# Altium PCB ArduinoUnoShield.PcbDoc
Units mil, origin at the board's own origin, x right, y up, seen from the top; angles counter-clockwise.
Board outline 2645 x 2100 mil, 2 copper layers (Top Layer, Bottom Layer), stack 62.8 mil thick; 58 components, 51 nets, 225 pads, 115 vias.
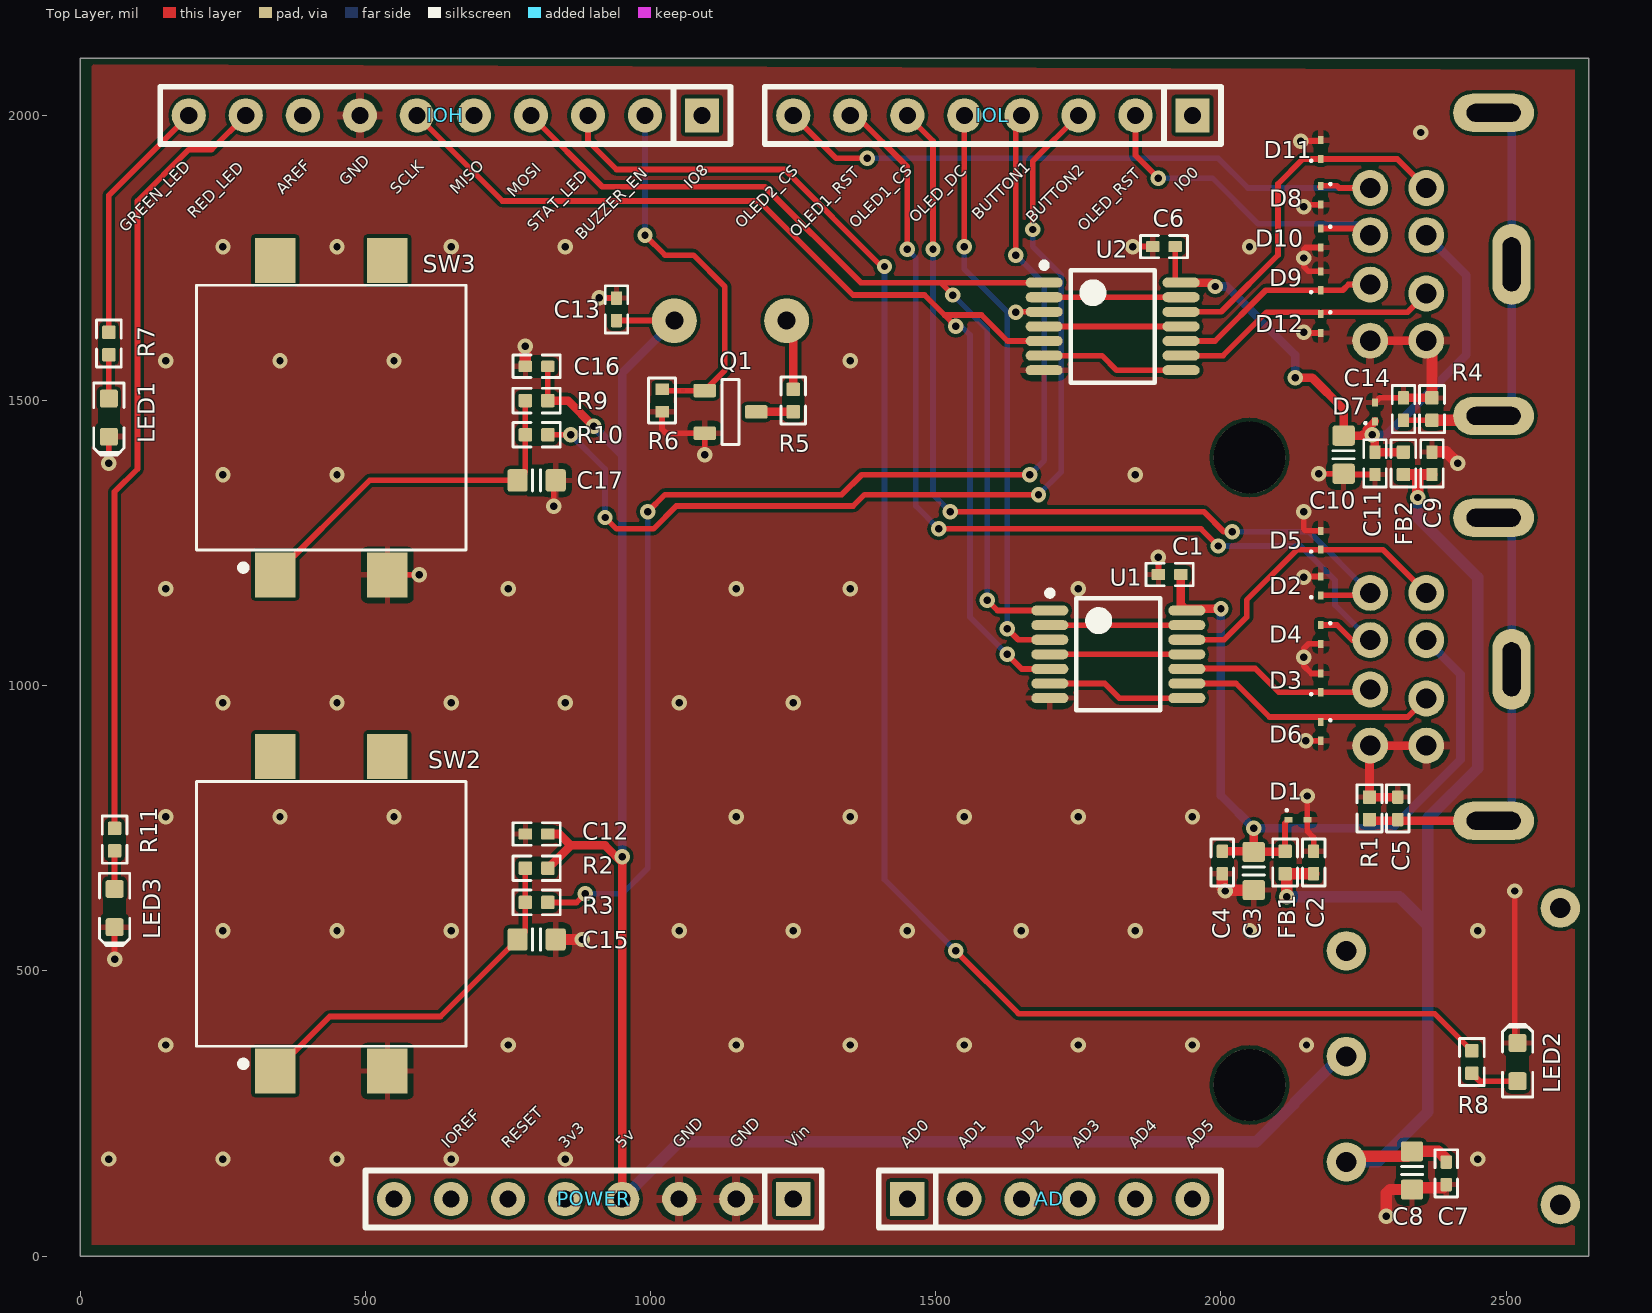
[diagram p0: Top Layer view]
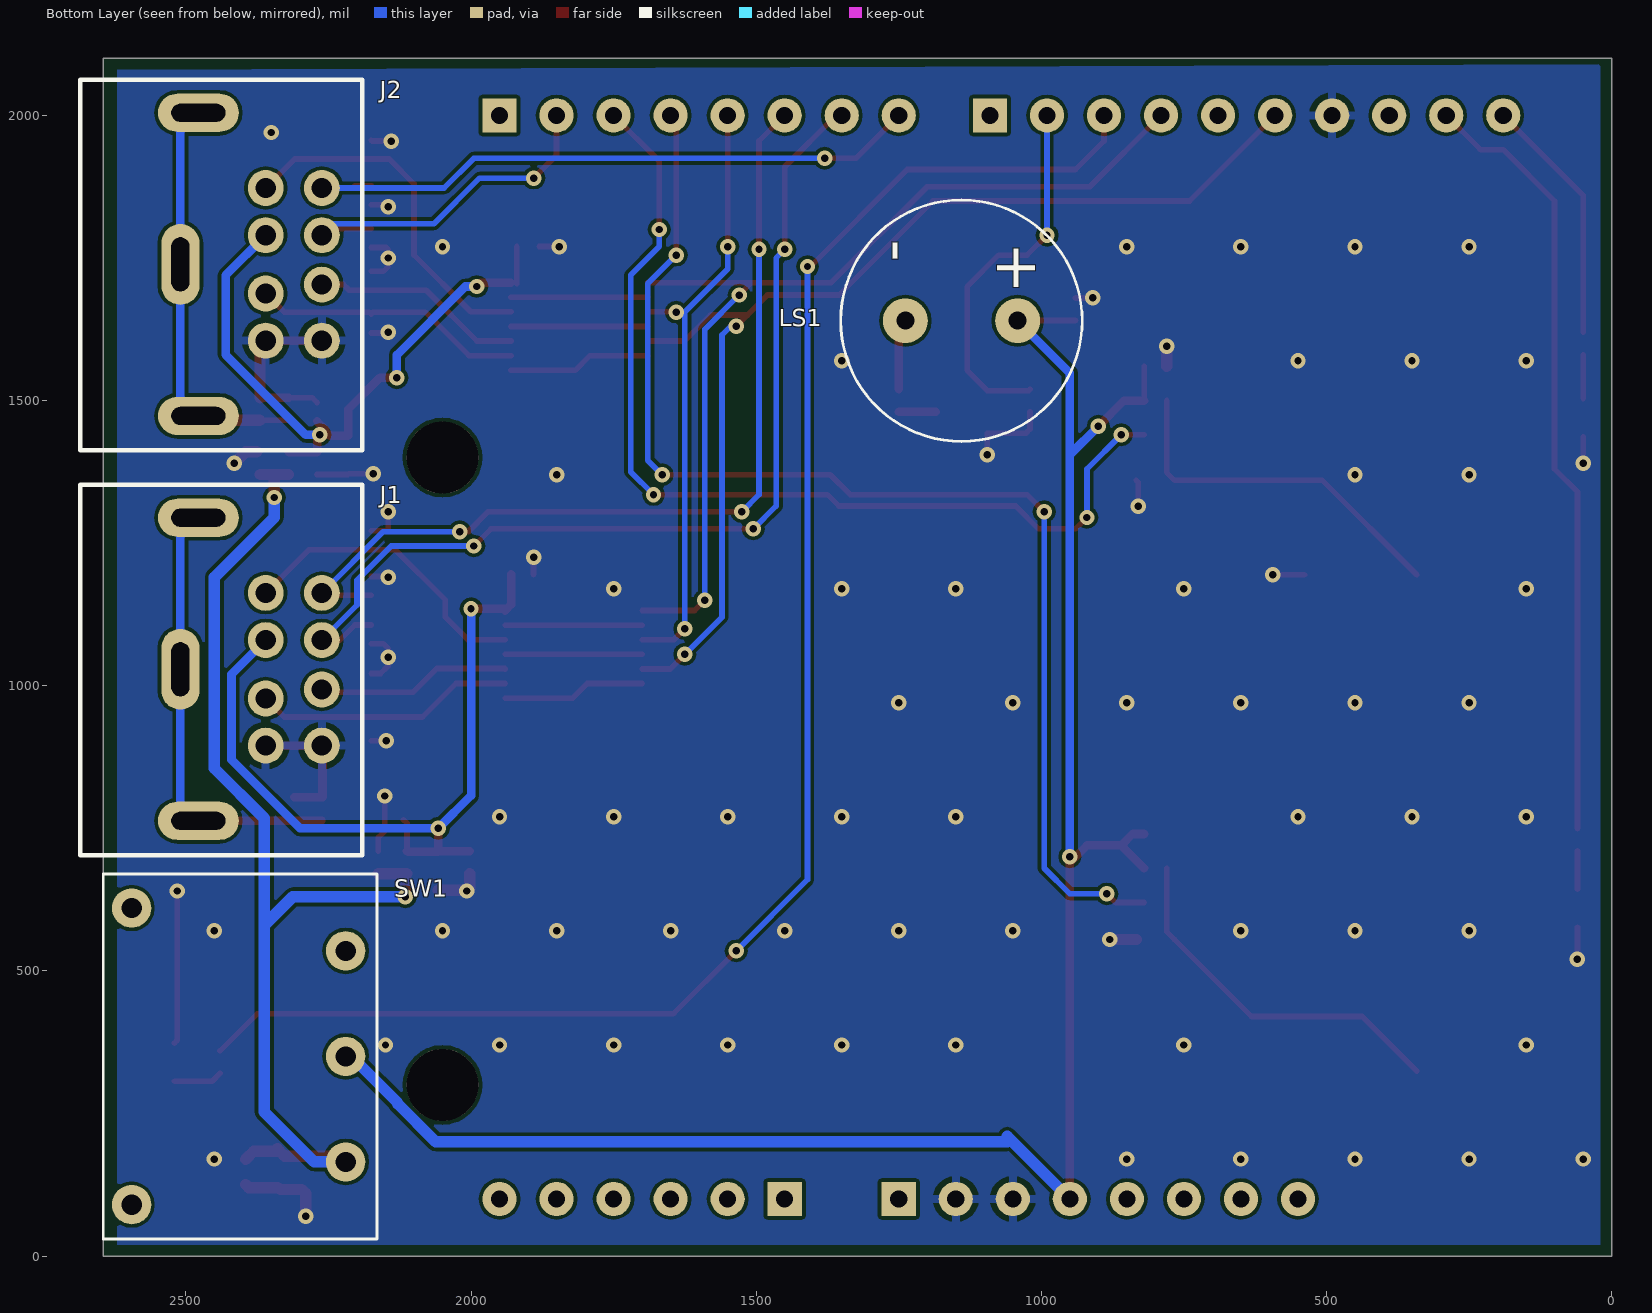
[diagram p1: Bottom Layer view, seen from below]
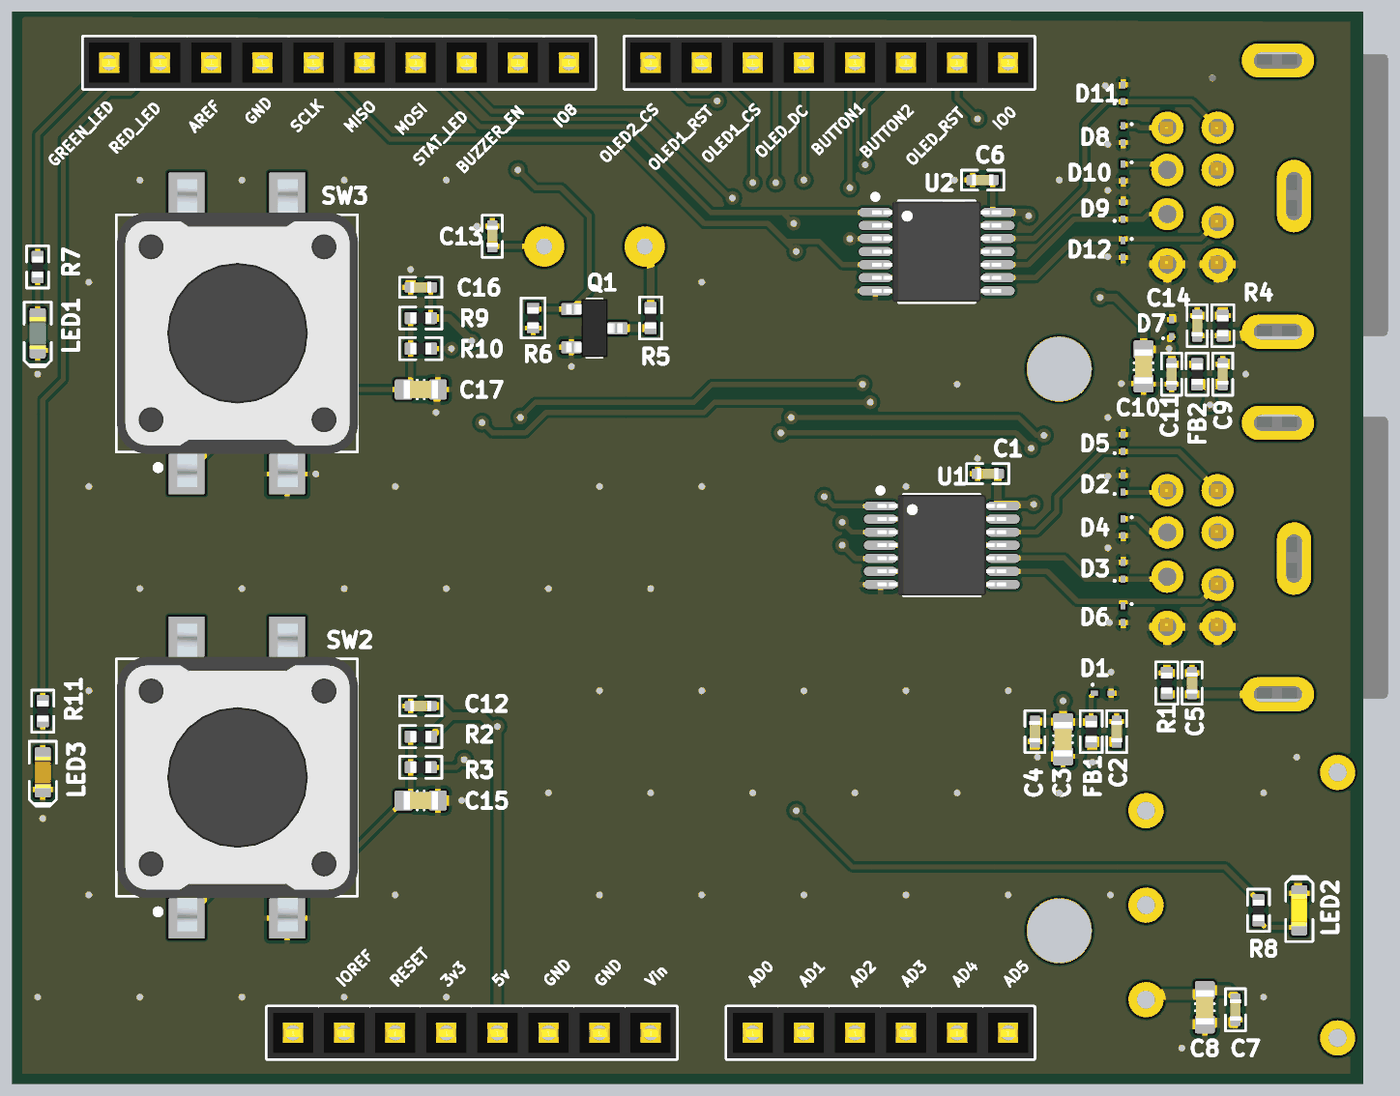
[diagram p2: 3D render of the assembled board from above, using the file's embedded part models]

## Layer stack, top to bottom
Top Solder: solder mask 1, Solder Resist, Dk 3.5
Top Layer: signal copper 1.4
Dielectric 1: core 60, FR-408, Dk 3.66
Bottom Layer: signal copper 1.4
Bottom Solder: solder mask 1, Solder Resist, Dk 3.5

## Board outline
0,0 0,2100 2645,2100 2645,0

## Design rules (kind name [scope] priority, off if disabled: settings)
Clearance [All] p1: gap=6 ignorepadtopadclearanceinfootprint=FALSE except(0: Arc-Hole Track-Hole SMDPad-Hole THPad-Hole Via-Hole Fill-Hole Poly-Hole Region-Hole Text-Hole)
ComponentClearance ComponentClearance_CAP_to_Hole [InComponent('C3') vs InComponent('MH3')] p1: gap=0 collisioncheckmode=3 verticalgap=0 showdistances=FALSE
ComponentClearance ComponentClearance_L1_to_Hole [InComponent('U6') vs InComponent('MH1')] p2: gap=0 collisioncheckmode=3 verticalgap=0 showdistances=FALSE
ComponentClearance [All] p3: gap=10 collisioncheckmode=3 verticalgap=10 showdistances=FALSE
HoleSize [All] p1: absolutevalues=TRUE maxlimit=260 minlimit=10 maxpercent=80.000 minpercent=20.000
MinimumSolderMaskSliver [All] p1: minsoldermaskwidth=4
PolygonConnect [All] p1: thpad.connectstyle=Relief thpad.reliefconductorwidth=15 thpad.reliefentries=4 thpad.polygonreliefangle="90 Angle" thpad.airgapwidth=10 smdpad.connectstyle=Relief smdpad.reliefconductorwidth=10 smdpad.reliefentries=4 smdpad.polygonreliefangle="90 Angle" smdpad.airgapwidth=10 via.connectstyle=Direct via.reliefconductorwidth=10 via.reliefentries=4 via.polygonreliefangle="90 Angle" via.airgapwidth=10
RoutingVias [All] p1: holewidth=13 width=27 viastyle="Through Hole" minholewidth=13 minwidth=27 maxholewidth=28 maxwidth=50
SilkToSilkClearance [All] p1: silktosilkclearance=5
SilkToSolderMaskClearance [IsPad] p1: minsilkscreentomaskgap=5 clearancetoexposedcopper=TRUE
SolderMaskExpansion [All] p1: expansion=4
Width [All] p1: maxlimit=30 minlimit=6 preferedwidth=6
25 further rules are at their usual default settings.

## Components (designator, comment, footprint, x,y, rotation, side; value= is the part's Value field where it differs from the comment)
AD "AD" "Header 6x1 8.5mm" 1450,100 r0 top locked
C1 "100n" CAPC0402 1910,1195 r180 top
C2 "100n" CAPC0402 2162.44,690 r90 top
C3 "4.7u" CAPC0603 2057.44,675 r270 top
C4 "100n" CAPC0402 2002.44,690 r270 top
C5 "100n" CAPC0402 2310,785 r270 top
C6 "100n" CAPC0402 1900,1770 r180 top
C7 "100n" CAPC0402 2395,145 r270 top
C8 "4.7u" CAPC0603 2335,150 r270 top
C9 "100n" CAPC0402 2370,1390 r90 top
C10 "4.7u" CAPC0603 2215,1405 r270 top
C11 "100n" CAPC0402 2270,1390 r270 top
C12 "100n" CAPC0402 800,740 r180 top
C13 "100n" CAPC0402 940,1660 r90 top
C14 "100n" CAPC0402 2320,1485 r270 top
C15 "1u" CAPC0603 800,555 r0 top
C16 "100n" CAPC0402 800,1560 r180 top
C17 "1u" CAPC0603 800,1360 r0 top
D1 "ESD9L5.0ST5G" SOD923 2135,765 r0 top
D2 "ESD9L5.0ST5G" SOD923 2175,1175 r90 top
D3 "ESD9L5.0ST5G" SOD923 2175,1005 r90 top
D4 "ESD9L5.0ST5G" SOD923 2175,1090 r270 top
D5 "ESD9L5.0ST5G" SOD923 2175,1255 r90 top
D6 "ESD9L5.0ST5G" SOD923 2175,920 r270 top
D7 "ESD9L5.0ST5G" SOD923 2270,1480 r90 top
D8 "ESD9L5.0ST5G" SOD923 2175,1860 r270 top
D9 "ESD9L5.0ST5G" SOD923 2175,1710 r90 top
D10 "ESD9L5.0ST5G" SOD923 2175,1785 r270 top
D11 "ESD9L5.0ST5G" SOD923 2175,1940 r90 top
D12 "ESD9L5.0ST5G" SOD923 2175,1635 r270 top
FB1 "MPZ1005S121C" RES0402 2112.44,690 r90 top value="120R @ 100 MHz"
FB2 "MPZ1005S121C" RES0402 2320,1390 r90 top value="120R @ 100 MHz"
IOH "IOH" "Header 10x1 8.5mm" 1090,2000 r180 top locked
IOL "IOL" "Header 8x1 8.5mm" 1950,2000 r180 top locked
J1 "TM0508A/8" "DIN SOCKET 8P THT" 2360,1080 r90 bottom
J2 "TM0508A/8" "DIN SOCKET 8P THT" 2360,1790 r90 bottom locked
LED1 "green" LED-0603-GREEN 50,1470 r270 top
LED2 "yellow" LED-0603-YELLOW 2520,340 r90 top
LED3 "red" LED-0603-RED 60,610 r270 top
LS1 "buzzer" "BUZZER DIA 9.5MM H 5MM" 1140,1640 r270 bottom
POWER "POWER_UNO" "Header 8x1 8.5mm" 1250,100 r180 top locked
Q1 "2N7002LT1G" SOT23-3 1140,1480 r0 top
R1 "100R" RES0402 2260.43,785 r270 top
R2 "10k" RES0402 800,680 r180 top
R3 "1k" RES0402 800,620 r180 top
R4 "100R" RES0402 2370,1485 r270 top
R5 "100R" RES0402 1250,1500 r270 top
R6 "10k" "RES0402 SMALL" 1020,1500 r270 top
R7 "220R" RES0402 50,1600 r270 top
R8 "220R" RES0402 2440,340 r270 top
R9 "10k" RES0402 800,1500 r180 top
R10 "1k" RES0402 800,1440 r180 top
R11 "220R" RES0402 60,730 r270 top
SW1 "switch" "SLIDE SWITCH 5MS1S102AM6QE" 2595,350 r270 bottom locked
SW2 "430162043826" 4301x20438x6_12*12 440,600 r90 top locked
SW3 "430162043826" 4301x20438x6_12*12 440,1470 r90 top locked
U1 "74LVX14MTC" TSSOP14 1820,1055 r0 top
U2 "74LVX14MTC" TSSOP14 1810,1630 r0 top

## Footprints (in the part's own frame and the unit in brackets; to place one, negate y for a bottom-side part, rotate by r counter-clockwise, add the part's x,y. Pads: shape width x height; smd on the part's side, far side on the other; paste and mask are expansions set on the pad)
4301x20438x6_12*12 [mm] "12*12mm vertical type,SMD, height 4.3mm,  T&R"
  rect 2x1.8 smd: 1(-7,2.5) 2(7,2.5) 3(-7,-2.5) 4(7,-2.5)
  silkscreen extent -6.81,-6 5.9,6, body extent -7.65,-6.03 7.65,5.97, height 4.33
"BUZZER DIA 9.5MM H 5MM" [mm]
  round 2 hole 0.8: 1(0,2.5) 2(0,-2.5)
  silkscreen extent -5.38,-5.38 5.38,5.38, body extent -5.26,-5.29 5.26,5.24, height 5.5
CAPC0402 [mm] "Chip Capacitor, Body 1.0x0.5mm, EIA 0402, IPC Medium Density"
  round 0.2 on Mech15: 0(0,0)
  rrect20% 0.6x0.5 smd: 1(-0.5,0) 2(0.5,0)
  Top Layer pour cut-out: -0.325,0.375 -0.2,0.5 0.2,0.5 0.325,0.375 0.325,-0.375 0.2,-0.5 -0.2,-0.5 -0.325,-0.375
  silkscreen extent -1.05,-0.5 1.05,0.5, body extent -0.52,-0.27 0.53,0.28, height 0.55
CAPC0603 [mm] "Chip Capacitor, Body 1.6x0.8mm, EIA 0603, IPC Medium Density"
  round 0.254 on Mech15: 0(0,0)
  rrect25% 0.9x1 smd: 1(-0.85,0) 2(0.85,0)
  Top Layer pour cut-out: -0.6,0.5 -0.4,0.7 0.4,0.7 0.6,0.5 0.6,-0.5 0.4,-0.7 -0.4,-0.7 -0.6,-0.5
  silkscreen extent -0.18,-0.48 0.18,0.48, body extent -0.85,-0.45 0.85,0.45, height 0.89
"DIN SOCKET 8P THT" [mm] "LUMBERG TM0508A 8P"
  oval 1.7x3.6 hole 0.8 slot 2.4 at 90 deg: 0(-8.05,3) 0(5.45,3)
  oval 3.6x1.7 hole 0.8 slot 2.4 at 0 deg: 0(-1.3,3.8)
  round 1.6 hole 0.9: 1(0,0) 2(-2.6,0) 3(2.1,0) 4(0,-2.5) 5(-4.7,0) 6(2.1,-2.5) 7(-2.2,-2.5) 8(-4.7,-2.5)
  silkscreen extent -9.58,-4.29 6.93,8.25, body extent -8.25,-4.37 5.75,8.46, height 13.1
"Header 6x1 8.5mm" [mil] "Stackable 6 pin header"
  rect 60x60 hole 30: 1(0,0)
  round 60 hole 30: 2(100,0) 3(200,0) 4(300,0) 5(400,0) 6(500,0)
  silkscreen extent -50,-50 550,50, body extent -50,-50 550,50, height 335
"Header 8x1 8.5mm" [mil] "Stackable 8 pin header"
  rect 60x60 hole 30: 1(0,0)
  round 60 hole 30: 2(100,0) 3(200,0) 4(300,0) 5(400,0) 6(500,0) 7(600,0) 8(700,0)
  silkscreen extent -50,-50 750,50, body extent -50,-50 750,50, height 335
"Header 10x1 8.5mm" [mil] "Stackable 10 pin header"
  rect 60x60 hole 30: 1(0,0)
  round 60 hole 30: 2(100,0) 3(200,0) 4(300,0) 5(400,0) 6(500,0) 7(600,0) 8(700,0) 9(800,0) 10(900,0)
  silkscreen extent -50,-50 950,50, body extent -50,-50 950,50, height 335
LED-0603-GREEN [mm]
  round 0.254 on Mech15: 0(0,0)
  rrect25% 0.8x0.8 smd: A(-0.85,0) K(0.85,0)
  Top Layer pour cut-out: -0.5,0.5 0.5,0.5 0.5,-0.5 -0.5,-0.5
  silkscreen extent -1.55,-0.67 1.68,0.67, body extent -0.8,-0.4 0.8,0.4, height 0.75
LED-0603-RED [mm]
  round 0.254 on Mech15: 0(0,0)
  rrect25% 0.8x0.8 smd: A(-0.85,0) K(0.85,0)
  Top Layer pour cut-out: -0.5,0.5 0.5,0.5 0.5,-0.5 -0.5,-0.5
  silkscreen extent -1.55,-0.67 1.68,0.67, body extent -0.8,-0.4 0.8,0.4, height 0.75
LED-0603-YELLOW [mm]
  round 0.254 on Mech15: 0(0,0)
  rrect25% 0.8x0.8 smd: A(-0.85,0) K(0.85,0)
  Top Layer pour cut-out: -0.5,0.5 0.5,0.5 0.5,-0.5 -0.5,-0.5
  silkscreen extent -1.55,-0.67 1.68,0.67, body extent -0.8,-0.4 0.8,0.4, height 0.75
RES0402 [mm] "Chip Resistor, Body 1.0x0.5mm, EIA 0402, IPC Medium Density"
  round 0.2 on Mech15: 0(0,0)
  rrect20% 0.6x0.6 smd: 1(-0.5,0) 2(0.5,0)
  Top Layer pour cut-out: -0.325,0.375 -0.2,0.5 0.2,0.5 0.325,0.375 0.325,-0.375 0.2,-0.5 -0.2,-0.5 -0.325,-0.375
  silkscreen extent -1.05,-0.55 1.05,0.55, body extent -0.52,-0.27 0.53,0.28, height 0.4
"RES0402 SMALL" [mm]
  rect 0.5x0.6 smd: 1(-0.5,0) 2(0.5,0)
  Top Layer pour cut-out: -0.325,0.375 -0.2,0.5 0.2,0.5 0.325,0.375 0.325,-0.375 0.2,-0.5 -0.2,-0.5 -0.325,-0.375
  silkscreen extent -1,-0.6 1,0.6, body extent -0.52,-0.27 0.53,0.28, height 0.4
"SLIDE SWITCH 5MS1S102AM6QE" [mm] "Switch: slide; Positions:2; SPDT; 2A/250VAC; 5A/28VDC; ON-ON"
  round 1.75 hole 0.9: 0(-6.605,0) 0(6.605,0) 1(4.7,9.53) 2(0,9.53) 3(-4.7,9.53)
  silkscreen extent -8.13,-1.27 8.13,10.92, body extent -6.6,-2.35 6.6,7.37, height 6.6
SOD923 [mm]
  rect 0.36x0.25 smd: A(0.42,0) K(-0.42,0)
  silkscreen extent -0.55,0.38 -0.45,0.47, body extent -0.43,-0.33 0.43,0.33, height 0.4
SOT23-3 [mm] "SOT23, 3 pin"
  round 0.5 on Mech15: 0(0,0)
  rrect25% 1x0.6 smd: 1(-1.15,0.95) 2(-1.15,-0.95) 3(1.15,0)
  silkscreen extent -0.38,-1.45 0.38,1.45, body extent -1.4,-1.45 1.4,1.45, height 1.29
TSSOP14 [mm] "TSSOP14"
  oval 1.65x0.45 smd mask+0.049: 1(-3.05,1.95) 2(-3.05,1.3) 3(-3.05,0.65) 4(-3.05,0) 5(-3.05,-0.65) 6(-3.05,-1.3) 7(-3.05,-1.95) 8(3.05,-1.95) 9(3.05,-1.3) 10(3.05,-0.65) 11(3.05,0) 12(3.05,0.65) 13(3.05,1.3) 14(3.05,1.95)
  silkscreen extent -3.17,-2.5 1.88,2.85, body extent -3.2,-2.5 3.2,2.5, height 1.2

## Part data
AD: Supplier Part Number 1=2699089, Supplier 1=Arrow, Supplier 2=Digi-Key, Supplier 3=Arrow, Supplier 4=Arrow, Supplier Part Number 2=SAM1198-06-ND, Supplier Part Number 3=2699088, Supplier Part Number 4=2699075
C1 C2 C4 C5 C6 C7 C9 C11 C12 C13 C14 C16: library part "CAP CER 0402 100n 16V X7R 10%", "Capacitor: ceramic; MLCC; 100nF; 16V; X7R; ±10%; SMD; 0402", Manufacturer=Murata, Manufacturer Part Number=GRM155R71C104KA88D, Package=0402, Ratings=16V, Supplier Part Number=GRM155R71C104KA, Tolerance=10%, Supplier=TME
C3 C8 C10: library part "CAP CER 0603 4.7u 10V X5R 10%", "Capacitor: ceramic; MLCC; 4.7uF; 10V; X5R; ±10%; SMD; 0603", Manufacturer=KEMET, Manufacturer Part Number=C0603C475K8PACTU, Package=0603, Ratings=10V, Supplier Part Number=C0603C475K8PAC, Tolerance=10%, Supplier=TME
C15 C17: library part "CAP CER 0603 1u 10V X5R 10%", "Capacitor: ceramic; MLCC; 1uF; 10V; X5R; ±10%; SMD; 0603", Manufacturer=Samsung, Manufacturer Part Number=CL10A105KP8NNNC, Package=0603, Ratings=10V, Supplier Part Number=CL10B105KO8NNNC, Tolerance=10%, Supplier=TME
D1 D2 D3 D4 D5 D6 D7 D8 D9 D10 D11 D12: library part "TVS ESD9L5.0ST5G", "Diode: transil; 150mW; 5.4V; unidirectional; SOD923", Manufacturer="ON Semi", Package=SOD923, Ratings="5.4V; 150mW", Manufacturer Part Number=ESD9L5.0ST5G, Supplier=TME, Supplier Part Number=ESD9L5.0ST5G
FB1 FB2: library part "FERRITE 0402 1.2A 120R @100MHz", "FERRITE BEAD 0402 1.2A 120R@100MHz", Current Rating=1.2A, DC Resistance (DCR)="90 mOhm Max", Manufacturer=TDK, Package=0402, Supplier Part Number 1=810-MPZ1005S121C, Manufacturer Part Number=MPZ1005S121C, Supplier=Mouser
IOH: Supplier Part Number 1=2698803S4475693N1004, Supplier 1=Arrow, Supplier 2=Digi-Key, Supplier 3=Arrow, Supplier Part Number 2=SAM1198-10-ND, Supplier Part Number 3=2698789
IOL POWER: Supplier Part Number 1=SAM1198-08-ND, Supplier 1=Digi-Key, Supplier 2=Arrow, Supplier 3=Arrow, Supplier 4=Arrow, Supplier Part Number 2=2698939, Supplier Part Number 3=2698940, Supplier Part Number 4=2698925
J1 J2: library part "DIN MINI SOCKET 8P horizontal THT", "Socket; DIN mini; female; PIN:8; shielded; THT; on PCBs; angled 90", Manufacturer=Lumberg, Category=Connectors, Manufacturer Part Number=TM0508A/8, NoPins=8, Supplier=TME, Supplier Part Number=TM0508A/8
LED1: library part "LED 0603 GREEN MASS", "LED; SMD; 0603; green; 3-12mcd; 1.6x0.8x0.65mm; 120°; 1.85÷2.5V", Manufacturer=Kingbright, Manufacturer Part Number=KPH-1608SGD, Package=0603, Ratings="1.85-2.5V; 20mA", Category=LEDs, Color=green, Luminosity=3-12mcd, Supplier=TME, Supplier Part Number=KPH-1608SGD
LED2: library part "LED 0603 YELLOW MASS", "LED; SMD; 0603; yellow; 3-8mcd; 1.6x0.8x0.65mm; 120°; 2.1÷2.5V; 20mA", Manufacturer=Kingbright, Manufacturer Part Number=KPH-1608YD, Package=0603, Ratings="2.1-2.5V; 20mA", Category=LEDs, Color=yellow, Luminosity=3-8mcd, Supplier=TME, Supplier Part Number=KPH-1608YD
LED3: library part "LED 0603 RED MASS", "LED; SMD; 0603; red; 5-12mcd; 1.6x0.8x0.65mm; 120°; 2÷2.5V; 20mA", Manufacturer=Kingbright, Manufacturer Part Number=KPH-1608ID, Package=0603, Ratings="2-2.5V; 20mA", Category=LEDs, Color=red, Luminosity=5-12mcd, Supplier=TME, Supplier Part Number=KPH-1608ID
LS1: library part "BUZZER LBMT0905XH05", "Elektromagnetic buzzer /w gen; O:9.5mm; H:5mm; 5VDC", Manufacturer=BESTAR, Manufacturer Part Number=BMT0905XH05, Rated voltage=5VDC, Supplier Part Number=BMT-0905XH0, Category="Audio Products", Dimension="Dia: 9.5mm, H: 5mm", Supplier=TME
Q1: library part "N-MOSFET 2N7002LT1G", "Transistor: N-MOSFET; unipolar; logic level; 60V; 115mA; 225mW", Manufacturer="ON Semiconductor", Package=SOT23-3, Ratings="60V, 115mA, 225mW", Category=Transistors, Manufacturer Part Number=2N7002LT1G, Supplier=TME, Supplier Part Number=2N7002LT1G
R1 R4: library part "RES 0402 100R 1% 63mW", "Resistor: thick film; SMD; 0402; 100R; 63mW; ±1%; -55÷155°C", Manufacturer=Vishay, Manufacturer Part Number=CRCW0402100RFKTDBC, Package=0402, Ratings=1/16W, Tolerance=1%, Supplier=TME, Supplier Part Number=CRCW0402100RFKTDBC
R2 R6 R9: library part "RES 0402 10k 1% 63mW", "Resistor: thick film; SMD; 0402; 10k; 63mW; ±1%; -55÷155°C", Manufacturer=ROHM, Manufacturer Part Number=0402WGF1002TCE, Package=0402, Ratings=1/16W, Supplier Part Number=SMD0402-10K-1%, Tolerance=1%, Supplier=TME
R3 R10: library part "RES 0402 1k 1% 63mW", "Resistor: thick film; SMD; 0402; 1k; 63mW; ±1%; -55÷155°C", Manufacturer=Vishay, Manufacturer Part Number=CRCW04021K00FKTDBC, Package=0402, Ratings=1/16W, Tolerance=1%, Supplier=TME, Supplier Part Number=CRCW04021K00FKTDBC
R5: library part "RES 0402 100R 1% 63mW", "Resistor: thick film; SMD; 0402; 100?; 63mW; ±1%; -55÷155°C", Manufacturer=Vishay, Manufacturer Part Number=CRCW0402100RFKTDBC, Package=0402, Ratings=1/16W, Tolerance=1%, Supplier=TME, Supplier Part Number=CRCW0402100RFKTDBC
R7 R8 R11: library part "RES 0402 220R 1% 63mW", "Rezystor: thick film; SMD; 0402; 220R; 63mW; ±1%; -55÷155°C", Manufacturer=ROHM, Manufacturer Part Number=0402WGF2200TCE, Package=0402, Ratings=1/16W, Supplier Part Number=SMD0402-220R-1%, Tolerance=1%, Supplier=TME
SW1: library part "SWITCH SLIDE SPDT THT", "Switch: slide; Positions:2; SPDT; 2A/250VAC; 5A/28VDC; ON-ON", Manufacturer=TME?, Manufacturer Part Number=5MS1S102AM6QE, Category=Switches, Supplier=TME, Supplier Part Number=5MS1S102AM6QE
SW2 SW3: library part "TACTILE SWITCH 12x12mm 430162043826", "12x12mm Vertical type, SMD, height 4.3mm, T&R", Manufacturer=Wurth, Category=Misc, Manufacturer Part Number=430162043826, Supplier=Wurth, Supplier Part Number=430162043826
U1 U2: library part "NOT GATE 6CH 74LVX14MTC", "C: digital; NOT; Channels:6; Inputs:6; SMD; TSSOP14; Series: LVX", Package=TSSOP14, Voltage="2 - 3.6V", Category="IC - Logic", Manfuacturer="ON Semi", Manufacturer Part Number=74LVX14MTC, Supplier=TME, Supplier Part Number=74LVX14MTC

## Free pads (board coordinates)
  round 125.98 hole 125.98: 0(2050,300) 0(2050,1400)

## Via types
v1: diameter 27, hole 13, Top Layer to Bottom Layer, tented both sides, 115 vias

## Nets (pads, with @x,y where several pads share a name; then routed paths per layer and width w, separated by ;. In a path a pad name is that pad's centre, name@x,y a point inside that pad or via, vN(x,y) a via of type N, cw(c..) or ccw(c..) an arc to the next point about the centre after c; other vN are vias at no path point)
+3V3: POWER.5
+5V: C2.1 C7.1 C8.1 C9.1 FB1.1 FB2.1 SW1.1 | length 1981.7
  Top Layer w20: v1(2115,630) 2115,667.76 FB1.1 C2.1 ; SW1.1 2229.84,175 2326.54,175 C8.1 ; FB2.1 2345,1370.32 ; C8.1@2339.96,188.43 C8.1 ; v1(2345,1330) 2345,1370.32 ; C9.1 2345,1370.32 ; C7.1@2395,169.68 2381.22,183.46 C8.1
  Bottom Layer w20: v1(2115,630) 2312.5,630 2362.5,580 ; SW1.1 2274.96,164.96 2362.5,252.5 2362.5,580 ; v1(2345,1330) 2345,1295 2450,1190 2450,855 2362.5,767.5 2362.5,580
+5V_OLED1: C1.1 C3.1 C4.1 D1.K FB1.2 J1.1 U1.14 | length 1393.8
  Top Layer w10: FB1.2 2112.44,758.98 D1.K
  Top Layer w15: C1.1 1929.68,1142.17 U1.14 ; U1.14@1940,1135 v1(2000,1135) ; C4.1 2056.22,709.68 C3.1 ; v1(2057.44,750) C3.1 ; FB1.2 2111.22,708.46 C3.1
  Bottom Layer w15: v1(2000,1135) 2000,807.44 v1(2057.44,750) 2300,750 2420,870 2420,1020 J1.1
+5V_OLED2: C6.1 C10.1 C11.1 D7.K FB2.2 J2.1 U2.14 | length 1127
  Top Layer w10: C6.1 1919.68,1705.32 U2.14@1920,1705
  Top Layer w15: U2.14 1983.23,1706.77 v1(1990,1700) ; v1(2130,1540) 2160,1540 2215,1485 C10.1 2246.54,1438.46 2248.07,1440 v1(2265,1440) 2270,1435 C11.1 FB2.2 ; v1@2255.77,1449.23 D7.K
  Bottom Layer w15: v1(1990,1700) 2010,1700 2130,1580 v1(2130,1540) ; v1(2265,1440) 2290,1440 2430,1580 2430,1720 J2.1
+5V_SW: C12.1 C13.1 C16.1 LS1.1 POWER.4 R2.1 R9.1 SW1.2 | length 3518.1
  Top Layer w10: R9.1 C16.1 ; C13.1 1041.26,1640.32 LS1.1
  Top Layer w15: R2.1 820,680 860,720 ; C12.1 840,740 860,720 ; R9.1 855,1500 v1(900,1455) ; POWER.4 v1@950,690 ; v1(950,700) v1@950,690 ; 860,720 920,720 v1@950,690
  Bottom Layer w15: v1(900,1455) 950,1405 ; v1(950,700) 950,1405 ; LS1.1 950,1548.43 950,1405
  Bottom Layer w20: POWER.4 1060,210 1060,200 2061.71,200 2128.99,267.28 2128.99,269.19 2214.8,355 SW1.2@2230,355
AD0: AD.1
AD1: AD.2
AD2: AD.3
AD3: AD.4
AD4: AD.5
AD5: AD.6
AREF: IOH.8
BUTTON1: IOL.4 R3.1 | length 2187.3
  Top Layer w10: R3.1 870,620 v1(885,635) ; v1(995,1305) 1025,1335 1335,1335 1370,1370 v1(1665,1370) ; v1(1640,1755) 1640,1990 IOL.4
  Bottom Layer w10: v1(885,635) 950,635 995,680 v1(995,1305) ; v1(1640,1755) 1690,1705 1690,1395 v1(1665,1370)
BUTTON2: IOL.3 R10.1 | length 1738.7
  Top Layer w10: R10.1 v1(860,1440) ; v1(920,1295) 940,1275 1005,1275 1045,1315 1355,1315 1375,1335 v1(1680,1335) ; v1(1670,1800) 1670,1920 IOL.3
  Bottom Layer w10: v1(860,1440) 920,1380 v1(920,1295) ; v1(1670,1800) 1670,1770 1720,1720 1720,1375 v1(1680,1335)
BUZZER_EN: IOH.2 Q1.1 R6.1 | length 660.2
  Top Layer w10: v1(990,1790) 1025,1755 1075,1755 1130,1700 1130,1552.68 Q1.1 1022.28,1517.4 R6.1
  Bottom Layer w10: v1(990,1790) IOH.2
GND: C1.2 C2.2 C3.2 C4.2 C5.1 C6.2 C7.2 C8.2 C9.2 C10.2 C11.2 C12.2 C13.2 C14.1 C15.2 C16.2 C17.2 D1.A D2.A D3.A D4.A D5.A D6.A D7.A D8.A D9.A D10.A D11.A D12.A IOH.7 J1.5 J1.8 J2.5 J2.8 LED1.K LED2.K LED3.K POWER.2 POWER.3 Q1.2 R1.1 R4.1 R6.2 SW2.3 SW3.3 U1.7 U2.7 | length 2242.1
  Top Layer w10: v1(50,1390) LED1.K ; v1(60,520) LED3.K ; SW3.3 v1(594.41,1194.41) ; v1(830,1315) 830,1356.54 C17.2 ; v1(910,1680) 910.32,1679.68 C13.2 ; R6.2 1020,1450 1027.4,1442.6 Q1.2 1094.72,1405.28 v1(1095,1405) ; v1(1845,1770) C6.2 ; v1(1890,1225) 1890.32,1224.68 C1.2 ; v1(2140,1955) 2173.46,1955 D11.A ; v1(2145,1190) 2146.54,1191.54 D2.A ; v1(2145,1305) 2145,1275 2148.46,1271.54 D5.A ; v1(2145,1620) 2146.54,1618.46 D12.A ; v1(2145,1840) 2141.54,1843.46 D8.A ; v1(2148.46,903.46) D6.A ; v1(2151.54,806.54) D1.A 2151.54,744.88 2162.44,733.98 C2.2 ; v1(2171.54,1371.54) C10.2 2216.22,1370.32 C11.2 ; D3.A 2158.46,1021.54 2145,1035 v1(2145,1050) 2145,1065 2153.46,1073.46 D4.A ; D9.A 2153.46,1726.54 2145,1735 v1(2145,1750) 2145,1765 2148.46,1768.46 D10.A ; D7.A 2278.15,1504.68 C14.1 ; v1(2515,640) 2515,378.46 LED2.K
  Top Layer w15: J2.8 J2.5 ; C5.1 R1.1 2260.43,893.82 J1.8 J1.5 ; C14.1 R4.1
  Top Layer w20: v1(780,1595) 780.32,1594.68 C16.2 ; C15.2 v1(880,555) ; C4.2 2002.44,645 v1(2007.44,640) 2008.98,641.54 C3.2 ; v1(2290,70) 2290,110 2296.54,116.54 C8.2 2338.46,120 2389.69,120 C7.2 ; J2.5 2370,1594.96 R4.1 ; C9.2@2375.31,1410 2395,1410 v1(2415,1390)
  other v1: 50,170 250,170 450,170 650,170 850,170 2450,170 150,370 750,370 1150,370 1350,370 1550,370 1750,370 1950,370 2150,370 250,570 450,570 650,570 1050,570 1250,570 1450,570 1650,570 1850,570 2050,570 2450,570 150,770 350,770 550,770 1150,770 1350,770 1550,770 1750,770 1950,770 250,970 450,970 650,970 850,970 1050,970 1250,970 150,1170 750,1170 1150,1170 1350,1170 1750,1170 250,1370 450,1370 1850,1370 150,1570 350,1570 550,1570 1350,1570 250,1770 450,1770 650,1770 850,1770 2050,1770 2350,1970
GREEN_LED: IOH.10 R7.1 | length 438.3
  Top Layer w10: R7.1 50,1860 IOH.10
IOREF: POWER.7
MISO: IOH.5
MOSI: IOH.4 U1.1 U2.1 | length 1729.5
  Top Layer w10: IOH.4 915,1875 1200,1875 1368.23,1706.77 1508.23,1706.77 ; v1(1530,1685) 1508.23,1706.77 ; v1(1590,1150) 1608.23,1131.77 U1.1 ; U2.1 1508.23,1706.77
  Bottom Layer w10: v1(1530,1685) 1590,1625 v1(1590,1150)
MOSI_BUF1: D5.K J1.3 U1.12 | length 534.3
  Top Layer w10: U1.12 2005.59,1080.59 2045,1120 2045,1150 2133.46,1238.46 D5.K 2284.21,1238.46 J1.3
MOSI_BUF2: D11.K J2.3 U2.12 | length 635.1
  Top Layer w10: U2.12 2000.59,1655.59 2100,1755 2100,1880 2143.46,1923.46 D11.K 2309.21,1923.46 J2.3
MOSI_INV1: U1.2 U1.13 | length 240.2
  Top Layer w10: U1.2 U1.13
MOSI_INV2: U2.2 U2.13 | length 240.2
  Top Layer w10: U2.2 U2.13
NetC15_1: C15.1 R2.2 R3.2 SW2.1 | length 651.2
  Top Layer w10: SW2.1 437.17,420 631.54,420 C15.1 780.32,568.78 R3.2 R2.2
NetC17_1: C17.1 R9.2 R10.2 SW3.1 | length 639.3
  Top Layer w10: SW3.1 507.17,1360 C17.1 780.32,1373.78 R10.2 R9.2
NetLED1_A: LED1.A R7.2 | length 76.9
  Top Layer w10: LED1.A R7.2
NetLED2_A: LED2.A R8.2 | length 85.7
  Top Layer w10: R8.2 2453.78,306.54 LED2.A
NetLED3_A: LED3.A R11.2 | length 66.9
  Top Layer w10: LED3.A R11.2
NetLS1_2: LS1.2 R5.1 | length 126.9
  Top Layer w10: LS1.2 LS1.2@1239.68,1641.26
  Top Layer w15: LS1.2 1250,1628.43 R5.1
NetQ1_3: Q1.3 R5.2 | length 64.9
  Top Layer w15: Q1.3 1249.68,1480 R5.2
OLED1_CS: D2.K IOL.6 J1.6 | length 1609.9
  Top Layer w10: IOL.6 1495,1955 v1(1495,1765) ; v1(1525,1305) 1970,1305 2005,1270 v1(2020,1270) ; D2.K 2257.36,1158.46 J1.6
  Bottom Layer w10: v1(1495,1765) 1495,1335 v1(1525,1305) ; v1(2020,1270) 2154.25,1270 J1.6
OLED1_RST: D4.K IOL.7 J1.4 | length 1764.7
  Top Layer w10: IOL.7 1360,2000 1450,1910 v1(1450,1765) ; v1(1505,1275) 1965,1275 v1(1995,1245) ; D4.K 2203.46,1106.54 2230,1080 J1.4 J1.4@2255.04,1073.46
  Bottom Layer w10: v1(1450,1765) 1465,1750 1465,1315 v1(1505,1275) ; v1(1995,1245) 2140,1245 2200,1185 2200,1141.57 J1.4
OLED1_SHLD: C5.2 J1.0 R1.2 | length 776.2
  Top Layer w10: R1.2 R1.2@2262.68,763.07
  Top Layer w15: R1.2@2262.68,763.07 J1.0@2478.11,763.07
  Bottom Layer w15: J1.0@2478.11,763.07 2509.61,794.57 2509.61,1028.82 2509.61,1263.07 J1.0@2478.11,1294.57
OLED2_CS: D8.K IOL.8 J2.6 | length 1154.7
  Top Layer w10: IOL.8 1325,1925 v1(1380,1925) ; D8.K@2173.46,1875 D8.K 2203.46,1876.54 2207.32,1872.68 J2.6
  Bottom Layer w10: v1(1380,1925) 1995,1925 2047.32,1872.68 J2.6
OLED2_RST: D10.K IOL.2 J2.4 | length 630.9
  Top Layer w10: IOL.2 1850,1930 v1(1890,1890) ; D10.K 2250.04,1801.54 J2.4
  Bottom Layer w10: v1(1890,1890) 1985,1890 2065,1810 2241.57,1810 J2.4
OLED2_SHLD: C14.2 J2.0 R4.2 | length 718.9
  Top Layer w10: C14.2 R4.2
  Top Layer w20: R4.2 2470.35,1465.32 J2.0@2478.11,1473.07
  Bottom Layer w15: J2.0@2478.11,1473.07 2509.61,1504.57 2509.61,1738.82 2509.61,1973.07 J2.0@2478.11,2004.57
OLED_DC: IOL.5 U1.3 U2.3 | length 1079.2
  Top Layer w10: v1(1550,1770) IOL.5 ; v1(1625,1100) 1644.41,1080.59 U1.3 ; v1@1640,1655.59 U2.3
  Bottom Layer w10: v1(1550,1770) 1550,1730.59 1625,1655.59 ; v1(1625,1100) 1625,1655.59 ; v1(1640,1655) 1625.59,1655 1625,1655.59
OLED_DC1: D3.K J1.7 U1.10 | length 341
  Top Layer w10: U1.10 1940.67,1030 2060,1030 2101.54,988.46 D3.K 2256.65,988.46 J1.7
OLED_DC2: D9.K J2.7 U2.10 | length 381.8
  Top Layer w10: U2.10 1989.41,1604.41 2078.46,1693.46 D9.K 2213.46,1693.46 2223.39,1703.39 J2.7 J2.7@2254.96,1710
OLED_DC_INV1: U1.4 U1.11 | length 240.2
  Top Layer w10: U1.4 U1.11
OLED_DC_INV2: U2.4 U2.11 | length 240.2
  Top Layer w10: U2.4 U2.11
RED_LED: IOH.9 R11.1 | length 1369
  Top Layer w10: R11.1 60,1340 100,1380 100,1850 190,1940 230,1940 IOH.9
RESET: POWER.6
SCLK: IOH.6 U1.5 U2.5 | length 1995.7
  Top Layer w10: IOH.6 740,1850 1190,1850 1355,1685 1480,1685 1515,1650 ; v1(1535,1630) 1515,1650 ; v1(1625,1055) 1650.59,1029.41 U1.5 ; U2.5 1625.59,1604.41 1580,1650 1515,1650
  Bottom Layer w10: v1(1535,1630) 1545,1630 1560,1615 1560,1120 v1(1625,1055)
SCLK_BUF1: D6.K J1.2 U1.9 | length 457.8
  Top Layer w10: U1.9 2026.18,1003.82 2085,945 2327.36,945 J1.2
SCLK_BUF2: D12.K J2.2 U2.9 | length 477.9
  Top Layer w10: U2.9 2003.82,1578.82 2080,1655 2171.54,1655 D12.K 2178.46,1655 2327.36,1655 J2.2
SCLK_INV1: U1.6 U1.8 | length 250.8
  Top Layer w10: U1.6 1796.18,1003.82 1821.77,978.23 U1.8
SCLK_INV2: U2.6 U2.8 | length 250.8
  Top Layer w10: U2.6 1791.18,1578.82 1816.77,1553.23 U2.8
STATUS_LED: IOH.3 R8.1 | length 2885.5
  Top Layer w10: IOH.3 890,1955 940,1905 1235,1905 1405,1735 v1(1410,1735) ; v1(1535,535) 1645,425 2374.69,425 R8.1
  Bottom Layer w10: v1(1410,1735) 1410,660 v1(1535,535)
VIN: POWER.1
pads on no net: C1.0 C2.0 C3.0 C4.0 C5.0 C6.0 C7.0 C8.0 C9.0 C10.0 C11.0 C12.0 C13.0 C14.0 C15.0 C16.0 C17.0 FB1.0 FB2.0 IOH.1 IOL.1 LED1.0 LED2.0 LED3.0 POWER.8 Q1.0 R1.0 R2.0 R3.0 R4.0 R5.0 R7.0 R8.0 R9.0 R10.0 R11.0 SW1.0 SW1.3 SW2.2 SW2.4 SW3.2 SW3.4

## Polygon pours and split planes (outlines as drawn)
GND on Bottom Layer "GND_L01_P-001" (solid, remove dead copper, pour order 2): 20,2090 20,2080 20,20 2620,20 2620,2080
GND on Top Layer "GND_L01_P-001" (solid, remove dead copper, pour order 0): 20,2090 20,2080 20,20 2620,20 2620,2080

## Silkscreen, mask and mechanical layers (free items; w line width, h text height)
Top Overlay:
  text "GND" at 465,1875 h20 r45
  text "IO8" at 1070,1870 h20 r45
  text "IO0" at 1930,1865 h20 r45
  text "AREF" at 355,1860 h20 r45
  text "SCLK" at 555,1860 h20 r45
  text "MISO" at 660,1860 h20 r45
  text "MOSI" at 760,1855 h20 r45
  text "RED_LED" at 200,1817.93 h20 r45
  text "BUTTON1" at 1575,1815 h20 r45
  text "OLED_DC" at 1465,1810 h20 r45
  text "BUTTON2" at 1670,1810 h20 r45
  text "OLED2_CS" at 1160,1800 h20 r45
  text "OLED1_CS" at 1360,1800 h20 r45
  text "STAT_LED" at 795,1795 h20 r45
  text "OLED_RST" at 1760,1795 h20 r45
  text "GREEN_LED" at 80,1792.93 h20 r45
  text "OLED1_RST" at 1255,1785 h20 r45
  text "BUZZER_EN" at 880,1780 h20 r45
  text "IOREF" at 645,187.07 h20 r45
  text "RESET" at 750,187.07 h20 r45
  text "3v3" at 850,187.07 h20 r45
  text "5v" at 950,187.07 h20 r45
  text "GND" at 1050,187.07 h20 r45
  text "GND" at 1150,187.07 h20 r45
  text "Vin" at 1250,187.07 h20 r45
  text "AD0" at 1450,187.07 h20 r45
  text "AD1" at 1550,187.07 h20 r45
  text "AD2" at 1650,187.07 h20 r45
  text "AD3" at 1750,187.07 h20 r45
  text "AD4" at 1850,187.07 h20 r45
  text "AD5" at 1950,187.07 h20 r45
  text "RESET" at 745,-2515 h20 r45
  text "3v3" at 845,-2515 h20 r45
  text "5v" at 945,-2515 h20 r45
  text "GND" at 1045,-2515 h20 r45
  text "GND" at 1145,-2515 h20 r45
  text "Vin" at 1245,-2515 h20 r45
Mechanical 1:
  circle w5: c2050,1400 r62.99
  circle w5: c2050,300 r62.99
Board Outline:
  lines w5: 0,0 0,2100 1950,2100 2645,2100 2645,0 2050,0 0,0

## Text inside footprints (layer, text, board x,y; h text height)
LS1: Bottom Overlay "-" at 1285.67,1781.73 h78.74 r90; Bottom Overlay "+" at 1077.01,1777.8 h78.74 r90